# EAGLE board AVR_12V_reset2 (EAGLE 9.5.2)
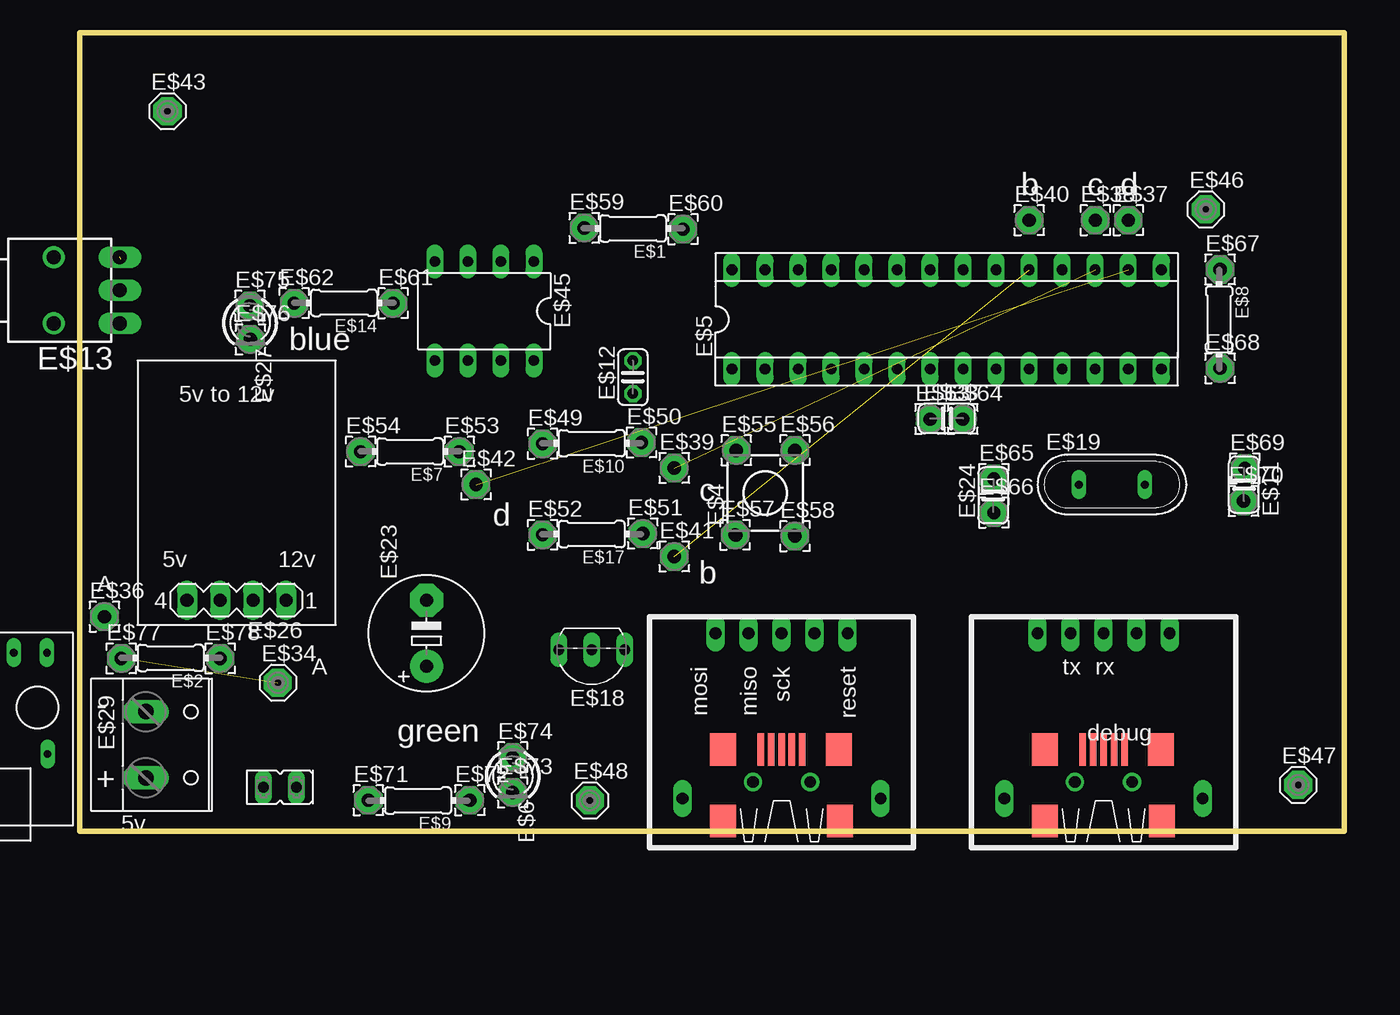
[diagram p0: board, top side]
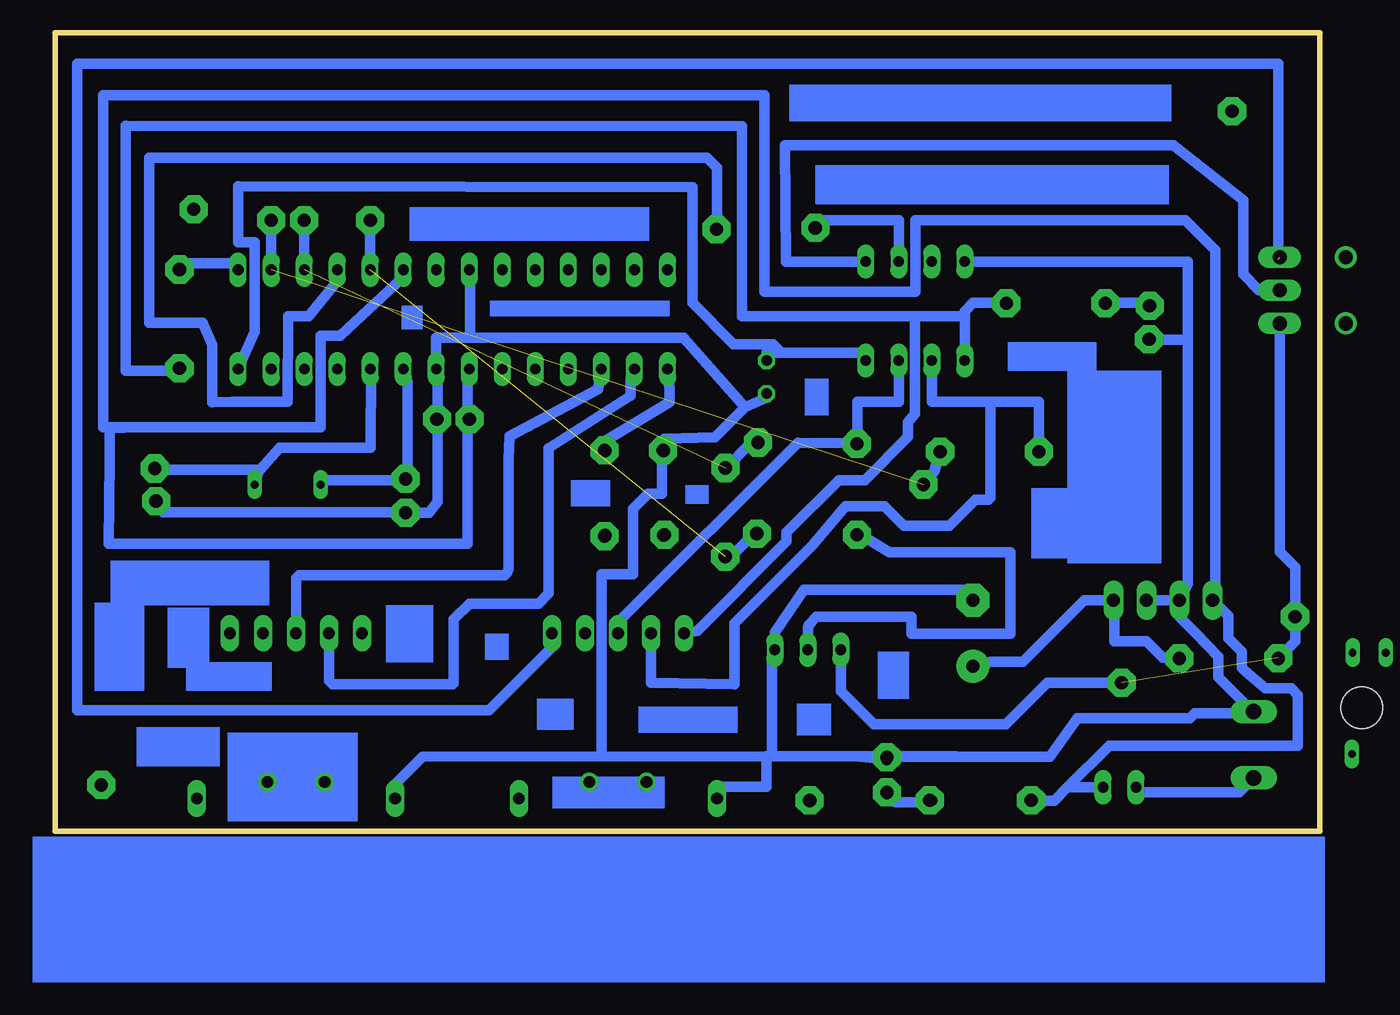
[diagram p1: board, bottom side, seen from below]

Size 97.25 x 61.42 mm. Coordinates in mm from the lower left corner, seen from the top.
Outline: 0,0 0,61.42 97.25,61.42 97.25,0 0,0
Copper layers (1*16): Top 0.035mm / dielectric 1.5mm / Bottom 0.035mm
Design rules "default": minimum track width 10mil, minimum drill 24mil, track to track 8mil, track to pad 8mil, pad to pad 8mil, via to via 8mil, smd to smd 8mil, copper to edge 40mil, drill to drill 8mil, minimum pad ring 10mil, minimum via ring 8mil, stop-mask expansion 4mil, vias tented up to drill 0mil, thermal gap 10mil

## Footprints (pad centres in the part's own frame; a part is rotated, then mirrored left to right if it is on the bottom)
0204/7 = drill 0.813 octagon: 1 -3.81,0; 2 3.81,0
FE02-1 = drill 0.813 long: 1 -1.27,0; 2 1.27,0
TL1105 = drill 1 pad 1.676: 1 -2.25,3.25; 2 2.25,3.25; 3 -2.25,-3.25; 4 2.25,-3.25
SOCKET-28-3 = drill 0.813 long: 1 -16.51,-3.81; 2 -13.97,-3.81; 3 -11.43,-3.81; 4 -8.89,-3.81; 5 -6.35,-3.81; 6 -3.81,-3.81; 7 -1.27,-3.81; 8 1.27,-3.81; 9 3.81,-3.81; 10 6.35,-3.81; 11 8.89,-3.81; 12 11.43,-3.81; 13 13.97,-3.81; 14 16.51,-3.81; 15 16.51,3.81; 16 13.97,3.81; 17 11.43,3.81; 18 8.89,3.81; 19 6.35,3.81; 20 3.81,3.81; 21 1.27,3.81; 22 -1.27,3.81; 23 -3.81,3.81; 24 -6.35,3.81; 25 -8.89,3.81; 26 -11.43,3.81; 27 -13.97,3.81; 28 -16.51,3.81
LED3MM = drill 0.813 octagon: A -1.27,0; K 1.27,0
C025-024X044 = drill 0.813 octagon: 1 -1.27,0; 2 1.27,0
TL3XWO = drill 1.1 pad 1.422 long: 1 -2.54,-5.08; 2 0,-5.08; 3 2.54,-5.08 | drill 1.1 pad 1.676: M1 -2.54,0; M2 2.54,0
USBMINIB = smd 2.5 x 0.5: D+ -3.85,0; D- -3.85,0.8; GND -3.85,-1.6; ID -3.85,-0.8; VBUS -3.85,1.6 | drill 0.9 long: P$1 5.08,0; P$2 5.08,2.54; P$3 5.08,5.08; P$4 5.08,-2.54; P$5 5.08,-5.08; P$6 -7.62,7.62; P$7 -7.62,-7.62 | drill 0.9: P$8 -6.35,2.2; P$9 -6.35,-2.2 | smd 2.5 x 2: P$10 -9.35,-4.5; P$11 -9.35,4.5; P$12 -3.85,-4.4; P$13 -3.85,4.5
USB-MICRO-PCB = drill 0.6 long: P$1 -5.08,6.35; P$2 -2.54,6.35; P$3 0,6.35; P$4 2.54,6.35; P$5 5.08,6.35; P$6 5.13,-1.45; P$7 -5.07,-1.45 | hole 3.2: -4.34,2.12; 4.36,2.12
TO92- = drill 0.813 long: 1 2.54,0; 2 0,0; 3 -2.54,0
QS = drill 0.61 long: 1 -2.54,0; 2 2.54,0
E5-8,5 = drill 1.016 pad 2.54: + -2.54,0 | drill 1.016 pad 2.54 octagon: - 2.54,0
MA04-1 = drill 1.016 long: 1 -3.81,0; 2 -1.27,0; 3 1.27,0; 4 3.81,0
W237-132 = drill 1.194 long: 1 -2.54,-0.635; 2 2.54,-0.635
MCS10B = drill 1.016 pad 2.159 octagon: MP 0,0
2,15/1,0 = drill 1.016 pad 2.159 octagon: 1 0,0
DIL08 = drill 0.813 long: 1 -3.81,-3.81; 2 -1.27,-3.81; 3 1.27,-3.81; 4 3.81,-3.81; 5 3.81,3.81; 6 1.27,3.81; 7 -1.27,3.81; 8 -3.81,3.81

## Placement (x,y rotation side)
E$1  1k  [0204/7]  42.55,46.36 180 top
E$2  1k  [0204/7]  6.99,13.34 180 top
E$3  [FE02-1]  15.4,3.4 0 top
E$4  [TL1105]  52.71,26.04 0 top
E$5  [SOCKET-28-3]  66.68,39.37 0 top
E$6  [LED3MM]  33.3,4.25 270 top
E$7  1k  [0204/7]  25.4,29.21 180 top
E$8  1k  [0204/7]  87.63,39.37 270 top
E$9  220  [0204/7]  26.02,2.38 180 top
E$10  1k  [0204/7]  39.37,29.85 180 top
E$11  22p  [C025-024X044]  89.54,26.67 270 top
E$12  [C025-024X044]  42.55,34.92 90 top
E$13  [TL3XWO]  -2,41.6 90 top
E$14  220  [0204/7]  20.32,40.64 180 top
E$15  [USBMINIB]  53.98,10.16 90 top
E$16  [USB-MICRO-PCB]  -7.6,7.4 0 top
E$17  2.2k  [0204/7]  39.37,22.86 180 top
E$18  s8050  [TO92-]  39.37,13.97 180 top
E$19  [QS]  79.38,26.67 0 top
E$21  [USBMINIB]  78.74,10.16 90 top
E$23  1000uF  [E5-8,5]  26.67,15.24 90 top
E$24  22p  [C025-024X044]  70.25,25.83 90 top
E$26  [MA04-1]  12.06,17.78 180 top
E$27  [LED3MM]  13.1,39.08 270 top
E$29  [W237-132]  5.72,6.67 270 top
E$33  1uF  [C025-024X044]  66.68,31.75 0 top
E$34  [MCS10B]  15.24,11.43 0 top
E$36  [2,15/1,0]  1.91,16.51 0 top
E$37  [2,15/1,0]  80.65,46.99 0 top
E$38  [2,15/1,0]  78.11,46.99 0 top
E$39  [2,15/1,0]  45.72,27.94 0 top
E$40  [2,15/1,0]  73.03,46.99 0 top
E$41  [2,15/1,0]  45.72,21.13 0 top
E$42  [2,15/1,0]  30.48,26.67 0 top
E$43  [MCS10B]  6.75,55.37 0 top
E$45  [DIL08]  31.12,40 180 top
E$46  [MCS10B]  86.59,47.83 0 top
E$47  [MCS10B]  93.71,3.57 0 top
E$48  [MCS10B]  39.23,2.39 0 top
E$49  [2,15/1,0]  35.6,29.8 0 top
E$50  [2,15/1,0]  43.2,29.9 0 top
E$51  [2,15/1,0]  43.3,22.9 0 top
E$52  [2,15/1,0]  35.6,22.8 0 top
E$53  [2,15/1,0]  29.2,29.2 0 top
E$54  [2,15/1,0]  21.6,29.2 0 top
E$55  [2,15/1,0]  50.5,29.3 0 top
E$56  [2,15/1,0]  55,29.3 0 top
E$57  [2,15/1,0]  50.4,22.8 0 top
E$58  [2,15/1,0]  55,22.7 0 top
E$59  [2,15/1,0]  38.8,46.4 0 top
E$60  [2,15/1,0]  46.4,46.3 0 top
E$61  [2,15/1,0]  24.1,40.6 0 top
E$62  [2,15/1,0]  16.5,40.6 0 top
E$63  [2,15/1,0]  65.4,31.7 0 top
E$64  [2,15/1,0]  67.9,31.7 0 top
E$65  [2,15/1,0]  70.3,27.1 0 top
E$66  [2,15/1,0]  70.3,24.5 0 top
E$67  [2,15/1,0]  87.7,43.2 0 top
E$68  [2,15/1,0]  87.7,35.6 0 top
E$69  [2,15/1,0]  89.6,27.9 0 top
E$70  [2,15/1,0]  89.5,25.4 0 top
E$71  [2,15/1,0]  22.2,2.4 0 top
E$72  [2,15/1,0]  30,2.4 0 top
E$73  [2,15/1,0]  33.3,3 0 top
E$74  [2,15/1,0]  33.3,5.7 0 top
E$75  [2,15/1,0]  13.08,40.41 0 top
E$76  [2,15/1,0]  13.14,37.83 0 top
E$77  [2,15/1,0]  3.2,13.3 0 top
E$78  [2,15/1,0]  10.8,13.3 0 top

## Library data of the parts
E$1 E$2 E$7-E$10 E$14 E$17 = eagle-ltspice
E$3 = con-lsta2
E$4 E$13 = switch
E$5 = ic-package
E$6 E$27 = led
E$11 E$12 E$24 E$33 = ref-packages
E$15 E$16 E$21 = LSGPackages
E$18 = transistor-fet
E$19 = special
E$23 = ref-packages-longpad
E$26 = con-lstb
E$29 = con-wago-508
E$34 E$43 E$46-E$48 = solpad
E$36-E$42 E$49-E$78 = wirepad
E$45 = 74xx-us

## Nets
12V: E$2.1 E$23.+ E$26.1
GND: E$4.1 E$5.8 E$5.22 E$6.A E$11.2 E$12.1 E$15.P$6 E$18.3 E$21.P$6 E$23.- E$24.1 E$26.2 E$26.3 E$27.K E$29.1 E$33.2 E$45.4
S$2: E$14.2 E$27.A
S$3: E$5.15 E$8.1
S$4: E$17.2 E$18.2
S$5: E$5.2 E$21.P$2
S$7: E$2.2 E$13.1 E$18.1 E$34.MP E$36.1
S$8: E$5.14 E$12.2 E$45.8
S$9: E$5.10 E$11.1 E$19.2
S$10: E$5.9 E$19.1 E$24.2
S$11: E$5.3 E$21.P$1
S$12: E$6.K E$9.1
S$13: E$5.16 E$7.1 E$37.1 E$42.1
S$15: E$5.17 E$10.1 E$38.1 E$39.1
S$16: E$3.1 E$29.2
S$17: E$1.1 E$5.18
S$18: E$1.2 E$45.2
S$19: E$5.19 E$17.1 E$40.1 E$41.1
S$22: E$13.3 E$15.P$5
S$23: E$13.2 E$45.1
S$24: E$8.2 E$14.1 E$15.P$3 E$45.5
S$25: E$7.2 E$15.P$2 E$45.6
S$26: E$10.2 E$15.P$1 E$45.7
S$27: E$4.2 E$5.1
VCC: E$3.2 E$5.7 E$5.20 E$9.2 E$26.4 E$33.1

## Tracks (layer width: path | path; a pad name or v marks a point on that pad's centre or on a via)
12V
  Bottom 0.813: E$2.1 12.06,13.34 13.33,14.61 15.81,14.61 15.81,17.71 E$26.1 18.1,17.78 22.84,13.05 25.3,13.05 E$23.+
GND
  Bottom 0.813: 44.2,32.6 46.5,30.3 50.4,30.2 E$4.1 50.6,28.75 50.6,25.95 51.65,25.95 52.8,24.8 52.8,19.78 55.25,19.79 55.25,5.76 | 44.2,32.6 42.55,33.35 E$12.1 | 67.85,32.2 67.85,34.5 E$5.8 67.95,37.95 65.35,37.95 | E$5.22 65.35,43.12 65.35,37.95 | 67.85,32.2 67.85,25.33 68.52,24.52 70.2,24.52 E$24.1 70.33,24.49 70.45,24.55 88.95,24.55 89.7,25.3 E$11.2 | 67.85,32.2 E$33.2 | 44.2,32.6 48.95,37.95 65.35,37.95 | 42.15,5.8 42.55,5.8 42.55,5.75 | 42.15,5.8 28.02,5.8 27.6,5.75 | E$15.P$6 46,3.45 42.55,3.45 42.55,5.75 | 42.15,5.8 42.15,13.91 E$18.3 41.91,15.31 39.69,18.6 26.66,18.6 E$23.- | 42.55,5.75 55.25,5.76 | 55.25,5.76 55.29,5.76 69,5.75 71.3,3.45 E$21.P$6 | E$6.A 35.29,5.75 27.6,5.75 | E$45.4 10.16,43.81 10.16,37.81 | E$27.K 10.16,37.81 | E$26.2 13.32,17.77 10.81,17.77 E$26.3 | 10.16,37.81 10.16,19.05 E$26.3 | E$26.3 10.79,16.49 9.55,15.25 7.8,13.45 7.8,11.86 5.12,9.17 E$29.1 5.19,9.1 9.6,9.1 10,8.7 18.64,8.71 20.75,5.75 27.6,5.75
S$2
  Bottom 0.813: E$27.A 13.38,40.64 E$14.2
S$3
  Bottom 0.813: E$5.15 83.17,43.7 87.77,43.7 E$8.1
S$4
  Bottom 0.813: E$17.2 35.65,23 33.1,21.45 23.8,21.45 23.8,15.2 31.4,15.2 31.4,16.5 38.7,16.5 39.29,15.91 39.37,15.62 E$18.2
S$5
  Bottom 0.813: E$5.2 53,34.77 53,33.5 59.3,29.46 59.3,18.3 60.1,17.5 65.4,17.5 66.6,16.3 66.6,11.4 66.7,11.3 75.9,11.3 76.2,11.6 E$21.P$2
S$7  (1 unrouted)
  Bottom 0.813: E$2.2 1.91,14.61 E$36.1 1.91,20.31 3.08,21.49 E$13.1 | E$34.MP 20.95,11.43 24.13,8.25 34.29,8.25 36.83,10.8 E$18.1
S$8
  Bottom 0.813: 41.4,36.8 42.55,36.8 E$12.2 | 41.4,36.8 35.04,36.8 E$45.8 | 41.4,36.8 42.06,37.47 45.09,37.47 48.26,40.64 48.26,49.53 83.2,49.6 83.2,45.29 81.92,45.29 81.92,38.4 E$5.14
S$9
  Bottom 0.813: 81.48,27.8 89.6,27.8 E$11.1 | 81.48,27.8 81.65,27.6 E$19.2 | 81.48,27.8 80,29.5 73,29.5 72.97,35.65 E$5.10
S$10
  Bottom 0.813: E$19.1 76.91,27 70.36,27 E$24.2 70.35,27.2 70.15,27.2 70.15,34.5 E$5.9
S$11
  Bottom 0.813: E$5.3 55.4,34.7 55.5,34 62.3,30.4 62.4,28.6 62.4,20.2 62.5,19.9 62.7,19.7 78.5,19.7 78.74,19.46 E$21.P$1
S$12
  Bottom 0.813: E$6.K 32.58,2.25 29.95,2.25 E$9.1
S$13  (1 unrouted)
  Bottom 0.813: E$7.1 29.65,27.68 E$42.1 | E$37.1 E$5.16
S$15  (1 unrouted)
  Bottom 0.813: E$10.1 43.78,29.85 45.68,27.94 E$39.1 | E$38.1 E$5.17
S$16
  Bottom 0.813: E$3.1 13.73,3 6.21,3 E$29.2
S$17
  Bottom 0.813: E$1.1 46.35,51.03 47.12,51.8 90.04,51.8 90.04,39.1 85.9,39.1 85.2,37.4 85.2,33 83.62,33.02 79.38,33.02 79.36,39.6 77.78,39.6 75.57,42.31 arc-2 E$5.18
S$18
  Bottom 0.813: E$1.2 38.1,46.99 32.38,46.99 E$45.2
S$19  (1 unrouted)
  Bottom 0.813: E$41.1 45.28,21.13 43.55,22.86 E$17.1 | E$40.1 E$5.19
S$22  (1 unrouted)
  Bottom 0.813: E$15.P$5 59.05,14.14 63.9,9.3 95.58,9.3 95.58,59.02 3.17,59.02 3.17,44
S$23
  Bottom 0.813: E$45.1 41.04,43.81 41.14,52.77 11.26,52.77 5.9,48.53 5.9,42.82 4.68,41.6 E$13.2
S$24
  Bottom 0.813: E$8.2 87.79,35.4 91.85,35.4 91.85,54.24 44.45,54.21 44.45,39.61 31.12,39.61 | E$45.5 27.3,39.61 | 27.3,39.61 27.3,40 26.67,40.64 E$14.1 | 27.3,39.61 31.12,39.61 | 31.12,39.61 31.12,32.13 31.15,32.1 31.67,31.46 31.67,30.33 35,27 37,27 41,23 41,22.3 47.87,15.43 E$15.P$3
S$25
  Bottom 0.813: 25.34,33.02 29.84,33.02 arc-3 29.84,35.56 E$45.6 | E$7.2 21.59,33.02 25.34,33.02 | E$15.P$2 51.43,11.43 45.01,11.3 45,16 39,22 36.5,25 33.5,25 32,23.5 28.5,23.5 26.5,25.5 25.5,25.5 25.34,25.66 25.34,33.02
S$26
  Bottom 0.813: E$45.7 32.38,33.02 35.56,33.02 E$10.2 40.12,29.9 53.8,16.22 53.8,15.41 E$15.P$1
S$27
  Bottom 0.813: E$5.1 50.1,34.5 arc23 50,34 50,33 55.2,29.9 E$4.2
VCC
  Bottom 0.813: 65.55,32.2 65.55,34.5 E$5.7 | 93.58,31.08 76.84,31.08 76.84,38.1 75.33,38.1 70.55,42.55 70.48,42.58 E$5.20 | 93.08,30.98 93.08,28.57 93.12,22.1 65.55,22.1 65.55,32.2 | 65.55,32.2 E$33.1 | 93.08,30.98 93.58,31.08 | 93.58,31.08 93.58,56.61 42.71,56.61 42.71,41.47 31.12,41.47 31.12,46.99 10.36,46.99 8.05,44.68 8.05,18.4 E$26.4 7.06,16.58 7.06,14.85 6,13.8 6,12.6 5.73,12.33 4.2,11 2.2,11 1.68,10.48 1.68,6.6 16.2,6.6 19.4,3.4 | 93.08,30.98 92,31.04 | 22.13,2.45 E$9.2 20.42,2.38 19.4,3.4 | 16.8,3.6 16.67,3.47 E$3.2 19.4,3.4
(copper drawn outside any net)
  shapes: Bottom area x25

## Text on the board
tPlace: b | c | d | blue | 5v to 12v | c | d | 5v | 12v | A | b | mosi | miso | sck | reset | A | tx | rx | - | green | debug | + | 5v